# Altium PCB PCB1.PcbDoc
Units mm, origin at the board's own origin, x right, y up, seen from the top; angles counter-clockwise.
Board outline 69.85 x 38.1 mm, 2 copper layers (Top Layer, Bottom Layer); 24 components, 21 nets, 134 pads, 30 vias.
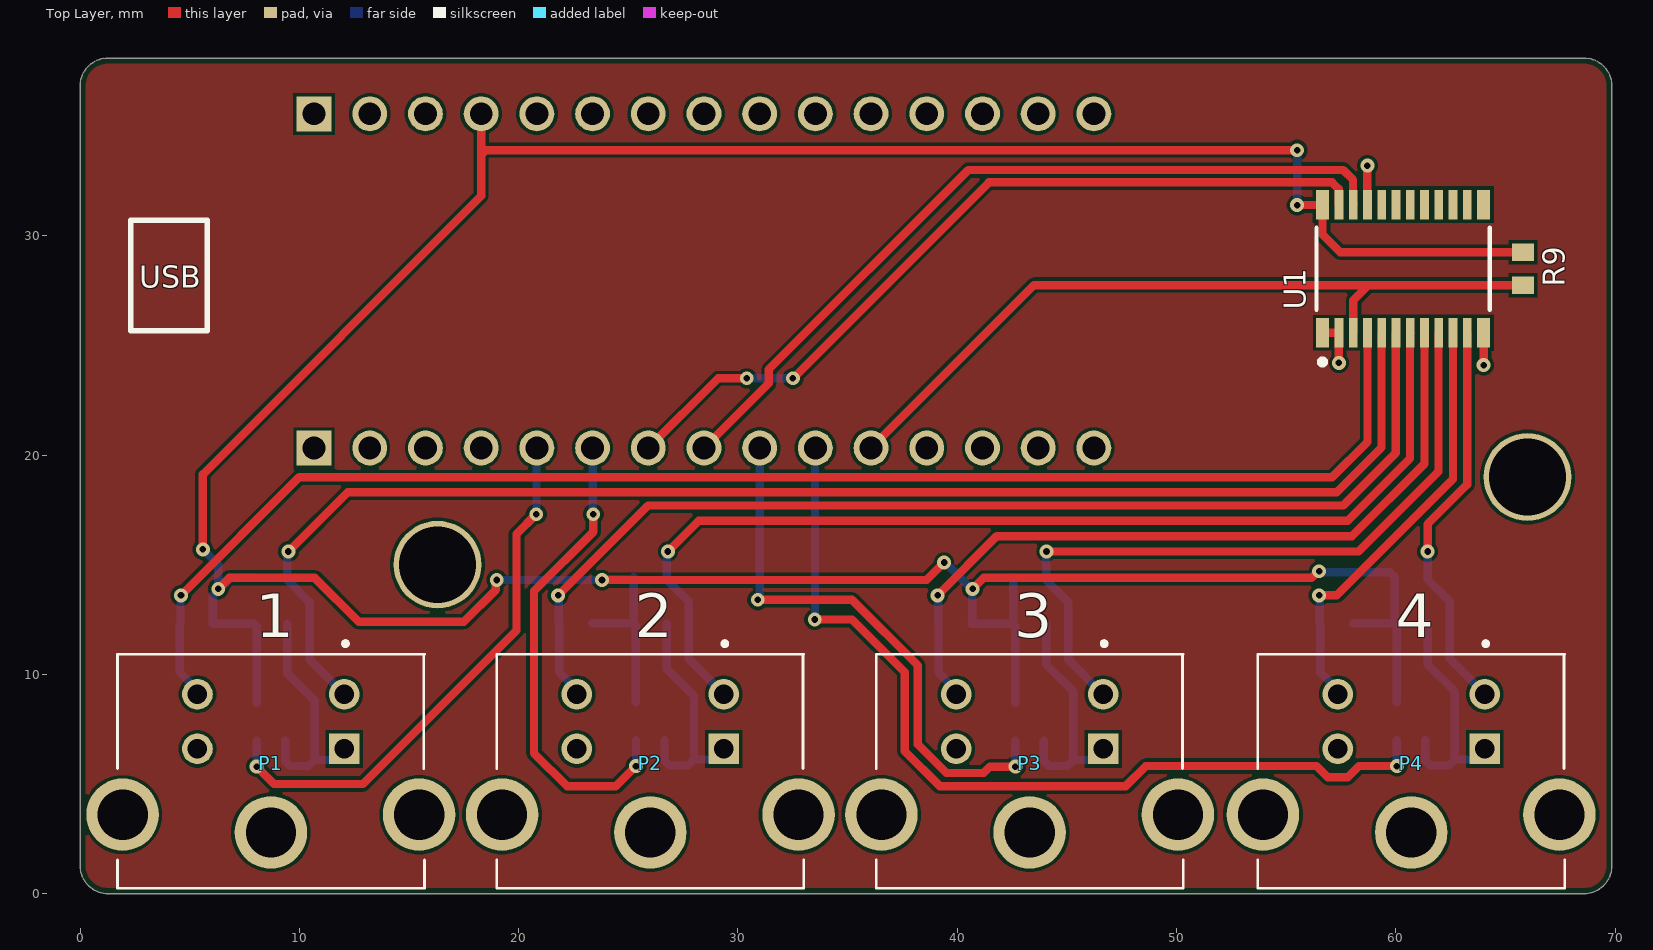
[diagram p0: Top Layer view]
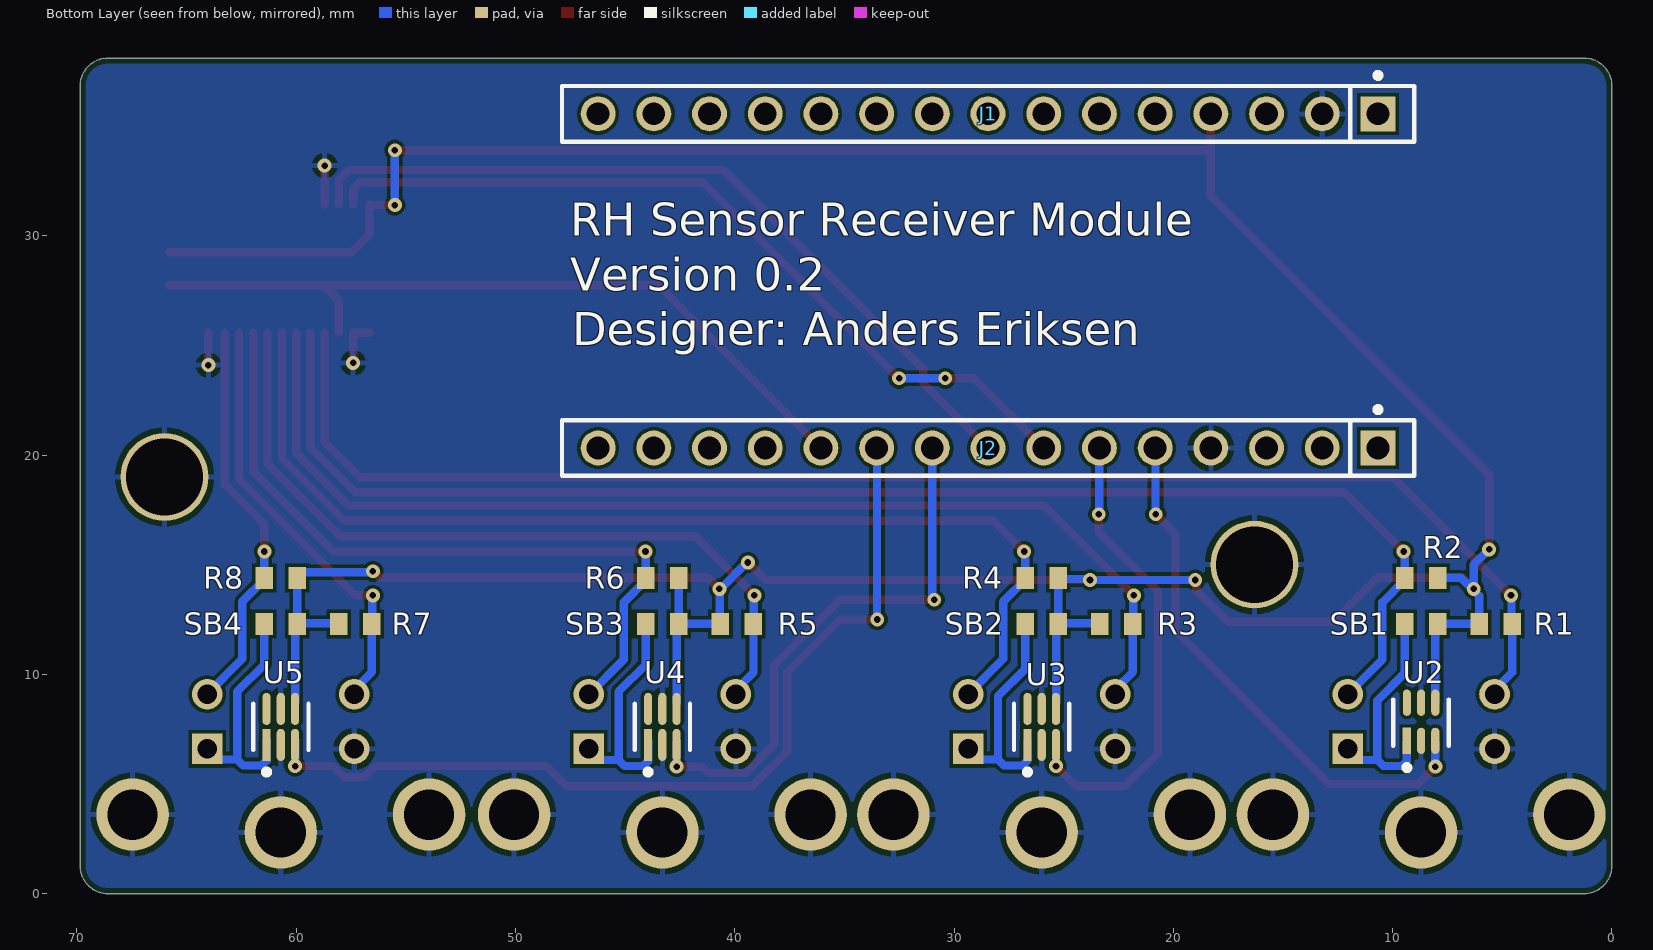
[diagram p1: Bottom Layer view, seen from below]
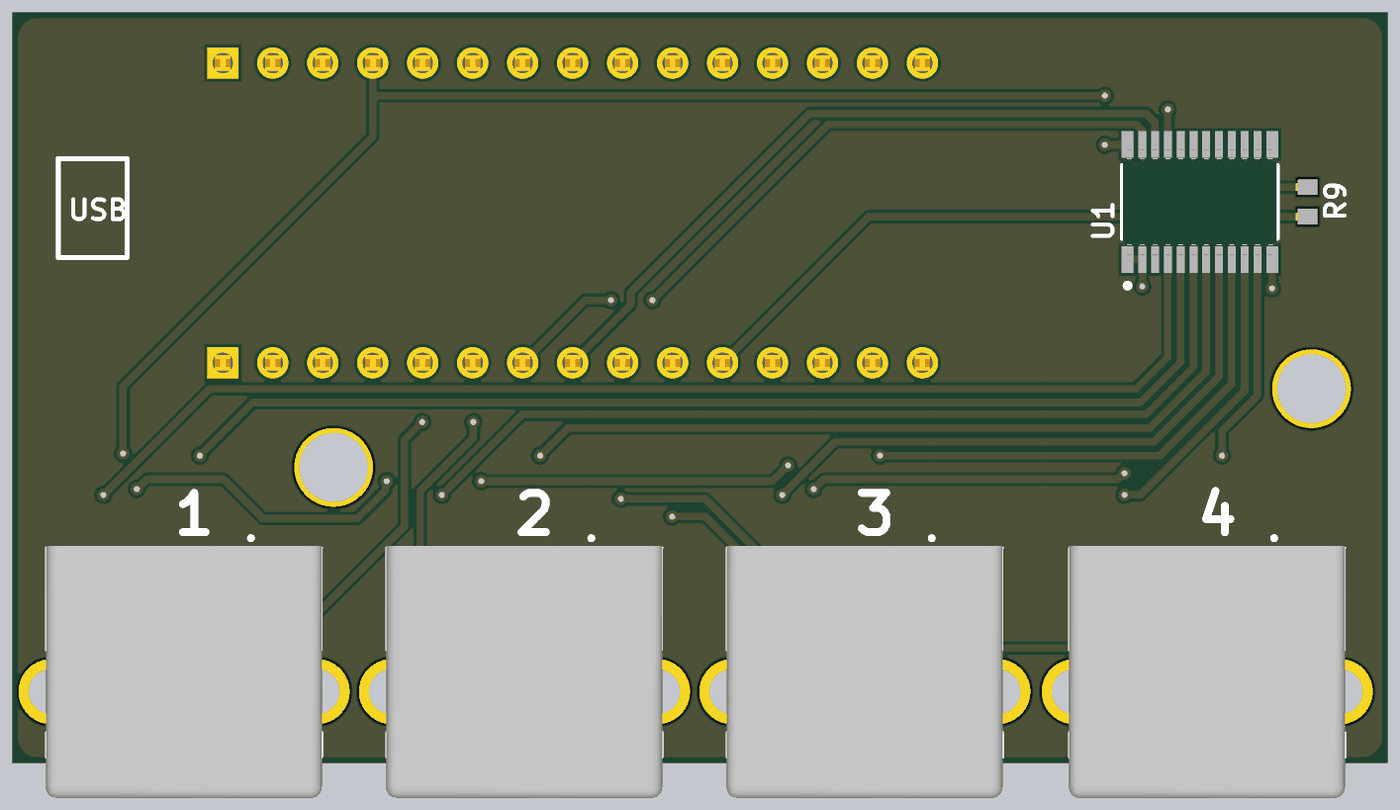
[diagram p2: 3D render of the assembled board from above, using the file's embedded part models]

## Layer stack, top to bottom
Top Solder: solder mask 0.0102, Solder Resist, Dk 3.5
Top Layer: signal copper 0.0356
Dielectric 1: dielectric 0.32, FR-4, Dk 4.8
Bottom Layer: signal copper 0.0356
Bottom Solder: solder mask 0.0102, Solder Resist, Dk 3.5

## Board outline
0,1.27 0,16.51 0,36.83 cw(c1.27,36.83) 1.27,38.1 68.58,38.1 cw(c68.58,36.83) 69.85,36.83 69.85,1.27 cw(c68.58,1.27) 68.58,0 1.27,0 cw(c1.27,1.27)

## Design rules (kind name [scope] priority, off if disabled: settings)
BoardOutlineClearance [All] p1: gap=0.254 ignorepadtopadclearanceinfootprint=FALSE except(0: Arc-SplitContinuation Track-SplitContinuation SMDPad-SplitContinuation THPad-SplitContinuation Via-SplitContinuation Fill-SplitContinuation Poly-SplitContinuation Region-SplitContinuation Text-SplitContinuation)
Clearance [All] p1: gap=0.15 ignorepadtopadclearanceinfootprint=FALSE
ComponentClearance [All] p1: gap=0 collisioncheckmode=3 verticalgap=0 showdistances=FALSE
PolygonConnect [All] p1: connectstyle=Relief reliefconductorwidth=0.254 reliefentries=4 polygonreliefangle="90 Angle" airgapwidth=0.254
RoutingVias [All] p1: holewidth=0.711 width=1.27 viastyle="Through Hole" minholewidth=0.711 minwidth=1.27 maxholewidth=0.711 maxwidth=1.27
SolderMaskExpansion [All] p1: expansion=0.102 istentingtop=FALSE
SupplyNets "Schematic Supply Nets" [InNet('GND')] p1: voltage=0.000
Width [All] p1: maxlimit=1 minlimit=0.254 preferedwidth=0.254 minimp=50.000000 maximp=50.000000 favimp=50.000000
29 further rules are at their usual default settings.

## Components (designator, comment, footprint, x,y, rotation, side; value= is the part's Value field where it differs from the comment)
J1 "SSW-115-01-T-S" FP-SSW-115-01-T-S-MFG 28.448,35.56 r0 bottom
J2 "SSW-115-01-T-S" FP-SSW-115-01-T-S-MFG 28.448,20.32 r0 bottom
P1 "mini-DIN-connector" TE_5749181-1 8.7,6.6 r180 top locked
P2 "mini-DIN-connector" TE_5749181-1 26,6.6 r180 top
P3 "mini-DIN-connector" TE_5749181-1 43.3,6.6 r180 top
P4 "mini-DIN-connector" TE_5749181-1 60.7,6.6 r180 top locked
R1 "2.2K" RESC1608X55X25ML10T15 5.3,12.3 r0 bottom
R2 "2.2K" RESC1608X55X25ML10T15 8.7,14.4 r180 bottom
R3 "2.2K" RESC1608X55X25ML10T15 22.6,12.3 r0 bottom
R4 "2.2K" RESC1608X55X25ML10T15 26,14.4 r180 bottom
R5 "2.2K" RESC1608X55X25ML10T15 39.9,12.3 r0 bottom
R6 "2.2K" RESC1608X55X25ML10T15 43.3,14.4 r180 bottom
R7 "2.2K" RESC1608X55X25ML10T15 57.3,12.3 r0 bottom
R8 "2.2K" RESC1608X55X25ML10T15 60.7,14.4 r180 bottom
R9 "2.2K" RESC1608X55X25ML10T15 65.8,28.5 r90 top
SB1 "0" RESC1608X55X25ML10T15 8.7,12.3 r180 bottom
SB2 "0" RESC1608X55X25ML10T15 26,12.3 r180 bottom
SB3 "0" RESC1608X55X25ML10T15 43.3,12.3 r180 bottom
SB4 "0" RESC1608X55X25ML10T15 60.7,12.3 r180 bottom
U1 "PCA9548APW,118" FP-SOT355-1-MFG 60.328,28.497 r90 top
U2 "MIC94073YC6-TR" FP-SC70-6LD-PL-1-IPC_B#1 8.7,7.8 r90 bottom
U3 "MIC94073YC6-TR" FP-SC70-6LD-PL-1-IPC_B#2 26,7.6 r90 bottom
U4 "MIC94073YC6-TR" FP-SC70-6LD-PL-1-IPC_B#2 43.3,7.6 r90 bottom
U5 "MIC94073YC6-TR" FP-SC70-6LD-PL-1-IPC_B#2 60.7,7.6 r90 bottom

## Footprints (in the part's own frame and the unit in brackets; to place one, negate y for a bottom-side part, rotate by r counter-clockwise, add the part's x,y. Pads: shape width x height; smd on the part's side, far side on the other; paste and mask are expansions set on the pad)
FP-SC70-6LD-PL-1-IPC_B#1 [mm]
  rect 1.2x0.376 smd paste+0 mask+0: 1(-0.835,0.65)
  rrect100% 1.2x0.376 smd paste+0 mask+0: 2(-0.835,0) 3(-0.835,-0.65) 4(0.905,-0.65) 5(0.905,0)
  rrect100% 1.2x0.37 smd paste+0 mask+0: 6(0.905,0.65)
  silkscreen extent -2.18,-1.26 1.05,1.26, body extent -1.05,-1.01 1.05,1.01, height 1.1
FP-SC70-6LD-PL-1-IPC_B#2 [mm]
  rect 1.464x0.376 smd paste+0 mask+0: 1(-0.82,0.65)
  rrect100% 1.464x0.376 smd paste+0 mask+0: 2(-0.82,0) 3(-0.82,-0.65) 4(0.82,-0.65) 5(0.82,0) 6(0.82,0.65)
  silkscreen extent -2.18,-1.26 1.05,1.26, body extent -1.05,-1.01 1.05,1.01, height 1.1
FP-SOT355-1-MFG [mm]
  rect 1.35x0.6 smd paste+0 mask+0: 1(-2.925,3.675) 12(-2.925,-3.675) 13(2.925,-3.675) 24(2.925,3.675)
  rect 1.35x0.4 smd paste+0 mask+0: 2(-2.925,2.925) 3(-2.925,2.275) 4(-2.925,1.625) 5(-2.925,0.975) 6(-2.925,0.325) 7(-2.925,-0.325) 8(-2.925,-0.975) 9(-2.925,-1.625) 10(-2.925,-2.275) 11(-2.925,-2.925) 14(2.925,-2.925) 15(2.925,-2.275) 16(2.925,-1.625) 17(2.925,-0.975) 18(2.925,-0.325) 19(2.925,0.325) 20(2.925,0.975) 21(2.925,1.625) 22(2.925,2.275) 23(2.925,2.925)
  silkscreen extent -4.37,-3.95 1.87,3.95, body extent -3.2,-3.9 3.2,3.9, height 1.1
FP-SSW-115-01-T-S-MFG [mm]
  rect 1.59x1.59 hole 1.04 paste-2539.97 mask+0: 1(-17.78,0)
  round 1.59 hole 1.04 paste-2539.97 mask+0: 2(-15.24,0) 3(-12.7,0) 4(-10.16,0) 5(-7.62,0) 6(-5.08,0) 7(-2.54,0) 8(0,0) 9(2.54,0) 10(5.08,0) 11(7.62,0) 12(10.16,0) 13(12.7,0) 14(15.24,0) 15(17.78,0)
  silkscreen extent -19.43,-1.87 19.43,1.27, body extent -19.3,-1.21 19.3,1.21, height 8.64
RESC1608X55X25ML10T15 [mm] "Chip Resistor, 2-Leads, Body 1.60x0.80mm, IPC Low Density"
  rect 0.8x1 smd: 1(-0.75,0) 2(0.75,0)
  body extent -0.85,-0.45 0.85,0.45, height 0.55
TE_5749181-1 [mm]
  rect 1.398x1.398 hole 0.89: 1(-3.35,0)
  round 1.398 hole 0.89: 2(3.35,0) 3(-3.35,-2.49) 4(3.35,-2.49)
  round 3.306 hole 2.29: 5(0,3.81) 6(6.76,3) 7(-6.76,3)
  silkscreen extent -7,-4.9 7,6.35, body extent -7,-4.41 7.03,8.41, height 13.02

## Part data
J1 J2: library part CMP-02766-001723-1, "CONN RCPT 15POS 0.1 TIN PCB", Color=Black, Contact Resistance=10mR, Max Current Rating=6.9A, Max Operating Temperature=105°C, Max Voltage Rating (AC)=550V, Min Operating Temperature=-55°C, Connector Type=Receptacle, Contact Material=Bronze, Contact Plating=Tin, Contact Type="Female Socket", Depth=2.41mm, Gender=Receptacle, Housing Color=Black, Housing Material=Polymer, Lead Free="Lead Free", Length=38.61mm, Mating Cycles=100, Mount="Through Hole", Number of Contacts=15, Number of Positions=15, Number of Rows=1, Orientation=Straight, Packaging=Bulk, Pitch=0.1inch, Radiation Hardening=No, REACH SVHC="No SVHC", RoHS Compliant=Yes, Series=SSW, Termination=Solder, Width=2.41mm
P1 P2 P3 P4: "https://dk.rs-online.com/web/p/din-stik/1644205?gb=s"
R1 R2 R3 R4 R5 R6 R7 R8 R9 SB1 SB2 SB3 SB4: library part CMP-2100-03667-1, "Chip Resistor, 0 Ohm, +/- 5%, 0.1 W, -55 to 155 degC, 0603 (1608 Metric), RoHS, Tape and Reel", Case Code (Imperial)=0603, Case Code (Metric)=1608, Manufacturer=Yageo, Max Operating Temperature=155degC, Min Operating Temperature=-55degC, Package Description="2-Pin Surface Mount Device, Body 1.6 x 0.8 mm", Package Quantity=5000, Power Rating=100mW, Temperature Coefficient=200ppm/degreesC, Tolerance=5%, Voltage Rating=50V, Case/Package=0603, Composition=ThickFilm, Contact Plating=Tin, Datasheet URL=http://www.yageo.com/NewPortal/yageodocoutput?fileName=/pdf/R-Chip/PYu-RC_Group_51_RoHS_L_5.pdf, Datasheet Version="Rev. 5, 10/2016", Depth=0.8mm, Height=0.45mm, Lead Free=LeadFree, Length=1.6mm, Manufacturer URL=http://www.yageo.com/, Military Standard=Not, Number of Pins=2, Package Reference=0603, Packaging=TapeandReel, Radiation Hardening=No, REACH SVHC=NoSVHC, RoHSCompliant=true, Termination=SMD/SMT, Voltage Rating (DC)=50V, Width=0.8mm
  R1 R2 R3 R4 R5 R6 R7 R8 R9: Resistance=2.2K
  SB1 SB2 SB3 SB4: Resistance=0
U1: library part CMP-2000-06880-2, "IC INTERFACE SPECIALIZED 24TSSOP", Case/Package=TSSOP, Low Level Output Current=9mA, Max Frequency=400kHz, Max Operating Temperature=85°C, Max Power Dissipation=400mW, Max Supply Voltage=5.5V, Min Operating Temperature=-40°C, Min Supply Voltage=2.3V, Nominal Supply Current=100mA, On-State Resistance=24R, Operating Supply Current=65uA, Package Quantity=2500, Bandwidth=400kHz, Contact Plating=Gold, Interface=I2C, Lead Free="Lead Free", Logic Function=Multiplexer, Mount="Surface Mount", Number of Channels=16, Number of Inputs=8, Number Of Outputs=1, Number of Pins=24, Packaging="Tape and Reel", Power Dissipation=400mW, Propagation Delay=0.3ns, Quiescent Current=65uA, Radiation Hardening=No, Turn-Off Delay Time=300ns, Turn-On Delay Time=300ns
U2 U3 U4 U5: library part CMP-06320-000041-1, "IC PWR SWITCH P-CHAN 1:1 SC70-6", Case/Package=SC, Current=1.2A, Max Operating Temperature=125°C, Min Operating Temperature=-40°C, On-State Resistance=120mR, On-state Resistance-Max=170MR, Package Quantity=3000, Voltage=5.5V, Current Rating=1.2A, Height=1mm, Interface=On/Off, Lead Free="Lead Free", Length=2.2mm, Max Output current=1.2A, Mount="Surface Mount", Number Of Outputs=1, Number of Pins=6, Output Configuration="High Side", Output Current=1.2A, Packaging="Tape and Reel", Rated Current-Max=1.2A, Reach SVHC Compliant=Yes, RoHS Compliant=Yes, Series=-, Width=1.35mm

## Free pads (board coordinates)
  round 4 hole 3.5: 2(16.3,15) 3(66,19)

## Via types
v1: diameter 0.635, hole 0.3, Top Layer to Bottom Layer, tented top, 30 vias

## Nets (pads, with @x,y where several pads share a name; then routed paths per layer and width w, separated by ;. In a path a pad name is that pad's centre, name@x,y a point inside that pad or via, vN(x,y) a via of type N, cw(c..) or ccw(c..) an arc to the next point about the centre after c; other vN are vias at no path point)
5V: J1.4 R1.2 R2.2 R3.2 R4.2 R5.2 R6.2 R7.2 R8.2 R9.2 SB1.2 SB2.2 SB3.2 SB4.2 U1.24 U2.4 U3.4 U4.4 U5.4 | length 171.1
  Top Layer w0.381: v1(5.6,15.7) 5.6,19.122 18.288,31.81 18.288,33.685 ; v1(6.3,13.9) 6.8,14.4 10.699,14.4 12.699,12.4 17.5,12.4 18.952,13.852 18.952,14.252 v1(19,14.3) ; J1.4 18.288,33.685 ; v1(23.8,14.3) 38.6,14.3 v1(39.4,15.1) ; v1(40.7,13.9) 41.2,14.4 56.15,14.4 56.45,14.7 v1(56.5,14.7) ; v1(55.5,31.4) 56.631,31.4 U1.24 56.653,30.047 57.45,29.25 R9.2 ; v1(55.5,33.9) 18.503,33.9 18.288,33.685
  Bottom Layer w0.381: v1(5.6,15.7) 6.3,15 v1(6.3,13.9) ; R2.2 6.869,14.4 6.369,13.9 v1(6.3,13.9) ; U2.4 8.047,8.708 8.047,12.203 SB1.2 R1.2 6.05,13.581 6.3,13.831 v1(6.3,13.9) ; v1(19,14.3) v1(23.8,14.3) 23.849,14.349 25.199,14.349 R4.2 ; R3.2@23.347,12.325 SB2.2@25.247,12.325 ; R4.2@25.247,14.425 SB2.2@25.247,12.325 ; U3.4@25.347,8.731 25.345,8.733 25.345,12.228 SB2.2@25.247,12.325 ; v1(39.4,15.1) 39.45,15.1 40.65,13.9 v1(40.7,13.9) 40.675,13.875 40.675,12.325 R5.2 ; R5.2@40.645,12.3 SB3.2@42.545,12.3 ; R6.2@42.545,14.4 SB3.2@42.545,12.3 ; U4.4@42.645,8.705 42.642,8.708 42.642,12.203 SB3.2@42.545,12.3 ; v1(55.5,31.4) v1(55.5,33.9) ; v1(56.5,14.7) 56.549,14.651 59.741,14.651 59.944,14.448 SB4.2@59.944,12.325 ; R7.2@58.044,12.325 SB4.2@59.944,12.325 ; U5.4@60.044,8.731 60.041,8.733 60.041,12.228 SB4.2@59.944,12.325
EN1: J2.5 U2.3 | length 25
  Top Layer w0.381: v1(8.052,5.791) 8.843,5 12.9,5 19.9,12 19.9,16.4 v1(20.8,17.3)
  Bottom Layer w0.381: U2.3 8.05,5.793 v1(8.052,5.791) ; v1(20.8,17.3) 20.814,17.314 20.814,20.306 J2.5
EN2: J2.6 U3.3 | length 21.9
  Top Layer w0.381: v1(23.4,17.3) 23.4,16.5 20.7,13.8 20.7,6.4 22.2,4.9 24.433,4.9 v1(25.349,5.817)
  Bottom Layer w0.381: J2.6 23.384,20.304 23.384,17.316 v1(23.4,17.3) ; U3.3@25.347,6.991 25.347,5.818 v1(25.349,5.817)
EN3: J2.9 U4.3 | length 25.4
  Top Layer w0.381: v1(30.9,13.4) 35.2,13.4 38.2,10.4 38.2,6.8 39.5,5.5 41.2,5.5 41.491,5.791 v1(42.647,5.791)
  Bottom Layer w0.381: v1(30.9,13.4) 30.9,13.469 30.988,13.557 J2.9 ; U4.3@42.645,6.965 42.645,5.793 v1(42.647,5.791)
EN4: J2.10 U5.3 | length 41.6
  Top Layer w0.381: v1(33.5,12.5) 35.2,12.5 37.6,10.1 37.6,6.5 39.2,4.9 47.681,4.9 48.598,5.817 56.383,5.817 56.9,5.3 57.8,5.3 58.317,5.817 v1(60.046,5.817)
  Bottom Layer w0.381: v1(33.5,12.5) 33.514,12.514 33.514,20.306 J2.10 ; U5.3@60.044,6.991 60.044,5.818 v1(60.046,5.817)
GND: J1.2 J2.4 P1.2 P1.5 P1.6 P1.7 P2.2 P2.5 P2.6 P2.7 P3.2 P3.5 P3.6 P3.7 P4.2 P4.5 P4.6 P4.7 pad.2 pad.3 U1.1 U1.2 U1.12 U1.21 U2.2 U2.5 U3.2 U3.5 U4.2 U4.5 U5.2 U5.5 | length 5.4
  Top Layer w0.381: U1.1 U1.2 57.401,25.571 57.401,24.201 v1(57.4,24.2) ; v1(58.7,33.2) 58.701,33.199 58.701,31.424 U1.21 ; v1(64,24.1) 64.001,24.101 64.001,25.571 U1.12
RST: J2.11 R9.1 U1.3 | length 35.3
  Top Layer w0.381: J2.11 43.498,27.75 R9.1 ; U1.3 58.063,25.582 58.063,27.062 58.75,27.75
SC1: P1.3 R2.1 U1.5 | length 64.5
  Top Layer w0.381: v1(9.5,15.6) 12.2,18.3 57.3,18.3 59.344,20.344 59.344,25.563 U1.5
  Bottom Layer w0.381: R2.1@9.45,14.3 10.465,13.285 10.465,10.675 P1.3 ; R2.1 9.45,15.55 v1(9.5,15.6)
SC2: P2.3 R4.1 U1.7 | length 48.8
  Top Layer w0.381: v1(26.8,15.6) 28.2,17 57.8,17 60.644,19.844 60.644,25.563 U1.7
  Bottom Layer w0.381: R4.1@26.747,14.325 27.762,13.311 27.762,10.701 P2.3@29.347,9.115 ; R4.1 26.75,15.55 v1(26.8,15.6)
SC3: P3.3 R6.1 U1.9 | length 33.3
  Top Layer w0.381: v1(44.069,15.6) 58.3,15.6 61.944,19.244 61.944,25.563 U1.9
  Bottom Layer w0.381: R6.1@44.045,14.3 45.06,13.285 45.06,10.675 P3.3@46.645,9.09 ; R6.1 44.05,15.678 v1@44.069,15.697
SC4: P4.3 R8.1 U1.11 | length 18.2
  Top Layer w0.381: v1(61.45,15.6) 61.45,16.85 63.253,18.653 U1.11
  Bottom Layer w0.381: R8.1@61.444,14.325 62.459,13.311 62.459,10.701 P4.3@64.044,9.115 ; R8.1 v1(61.45,15.6)
SCL: J2.8 U1.22 | length 36.5
  Top Layer w0.381: J2.8 31.4,23.272 31.4,23.9 40.5,33 57.6,33 58.044,32.557 58.044,31.432 U1.22
SD1: P1.4 R1.1 U1.4 | length 66.8
  Top Layer w0.381: v1(4.6,13.6) 9.987,18.987 57.087,18.987 58.703,20.603 U1.4
  Bottom Layer w0.381: v1(4.6,13.6) 4.575,13.575 4.575,12.325 R1.1 4.55,10.087 5.35,9.287 P1.4
SD2: P2.4 R3.1 U1.6 | length 51.2
  Top Layer w0.381: v1(21.8,13.6) 25.9,17.7 57.6,17.7 59.993,20.094 59.993,25.563 U1.6
  Bottom Layer w0.381: v1(21.8,13.6) 21.825,13.575 21.825,12.325 R3.1 ; R3.1@21.847,12.325 21.847,10.112 22.647,9.312 P2.4@22.647,9.115
SD3: P3.4 R5.1 U1.8 | length 35.5
  Top Layer w0.381: v1(39.1,13.6) 41.8,16.3 58,16.3 61.303,19.603 U1.8
  Bottom Layer w0.381: v1(39.1,13.6) 39.125,13.575 39.125,12.325 R5.1 ; R5.1@39.145,12.3 39.145,10.087 39.945,9.287 P3.4@39.945,9.09
SD4: P4.4 R7.1 U1.10 | length 19.8
  Top Layer w0.381: v1(56.5,13.6) 57.3,13.6 62.603,18.903 U1.10
  Bottom Layer w0.381: v1(56.5,13.6) 56.525,13.575 56.525,12.325 R7.1 ; R7.1@56.544,12.325 56.544,10.112 57.344,9.312 P4.4@57.344,9.115
SDA: J2.7 U1.23 | length 37.3
  Top Layer w0.381: J2.7 29.088,23.5 v1(30.4,23.5) ; v1(32.5,23.5) 41.438,32.438 57.094,32.438 57.393,32.138 57.393,31.432 U1.23
  Bottom Layer w0.381: v1(30.4,23.5) v1(32.5,23.5)
VDD1: P1.1 SB1.1 U2.1 | length 10.8
  Bottom Layer w0.381: U2.1 9.353,6.963 9.353,6.04 9.576,5.817 10.421,5.817 10.696,6.091 ; SB1.1 9.45,10.05 10.696,8.804 10.696,6.091 ; P1.1 11.542,6.091 10.696,6.091
VDD2: P2.1 SB2.1 U3.1 | length 10.7
  Bottom Layer w0.381: U3.1@26.647,6.991 26.65,6.988 26.65,6.065 26.873,5.842 27.719,5.842 27.994,6.117 ; SB2.1 26.75,10.25 27.994,9.007 27.994,6.117 ; P2.1@29.347,6.625 28.839,6.117 27.994,6.117
VDD3: P3.1 SB3.1 U4.1 | length 10.8
  Bottom Layer w0.381: U4.1@43.945,6.965 43.947,6.963 43.947,6.04 44.171,5.817 45.016,5.817 45.291,6.091 ; SB3.1 44.05,10.45 45.291,9.209 45.291,6.091 ; P3.1@46.645,6.6 46.136,6.091 45.291,6.091
VDD4: P4.1 SB4.1 U5.1 | length 10.7
  Bottom Layer w0.381: U5.1@61.344,6.991 61.346,6.988 61.346,6.065 61.57,5.842 62.415,5.842 62.69,6.117 ; SB4.1 61.45,10.45 62.69,9.21 62.69,6.117 ; P4.1@64.044,6.625 63.535,6.117 62.69,6.117
pads on no net: J1.1 J1.3 J1.5 J1.6 J1.7 J1.8 J1.9 J1.10 J1.11 J1.12 J1.13 J1.14 J1.15 J2.1 J2.2 J2.3 J2.12 J2.13 J2.14 J2.15 U1.13 U1.14 U1.15 U1.16 U1.17 U1.18 U1.19 U1.20 U2.6 U3.6 U4.6 U5.6

## Polygon pours and split planes (outlines as drawn)
GND on Bottom Layer "NONET_L-01_P-001" (solid, pour order 2): 0,0 0,38.3 69.9,38.3 70.2,38 70.2,0
no net on Top Layer "NONET_L-01_P-001" (solid, pour order 3): 0.12,0.032 0.12,38.332 70.02,38.332 70.32,38.032 70.32,0.032

## Silkscreen, mask and mechanical layers (free items; w line width, h text height)
Top Overlay:
  lines w0.254: 2.3,25.675 5.8,25.675 5.8,30.7 2.3,30.7 2.3,25.675
  text "USB" at 2.7,27.625 h1
  text "1" at 8,11.701 h2
  text "2" at 25.3,11.701 h2
  text "3" at 42.6,11.701 h2
  text "4" at 60,11.701 h2
Bottom Overlay:
  text "RH Sensor Receiver Module" at 47.5,30 h1.5
  text "Version 0.2" at 47.5,27.5 h1.5
  text "Designer: Anders Eriksen" at 47.4,25 h1.5
Mechanical 1:
  lines w0.1: 0,1.27 ccw(c1.27,1.27) 1.27,0 ; 0,36.83 cw(c1.27,36.83) 1.27,38.1 ; 68.58,0 ccw(c68.58,1.27) 69.85,1.27 ; 68.58,38.1 cw(c68.58,36.83) 69.85,36.83